# Altium PCB PCB.pcbdoc
Units mm, origin at the board's own origin, x right, y up, seen from the top; angles counter-clockwise.
Board outline 85.65 x 96.58 mm, 2 copper layers (Top Layer, Bottom Layer); 20 components, 15 nets, 79 pads, 6 vias.
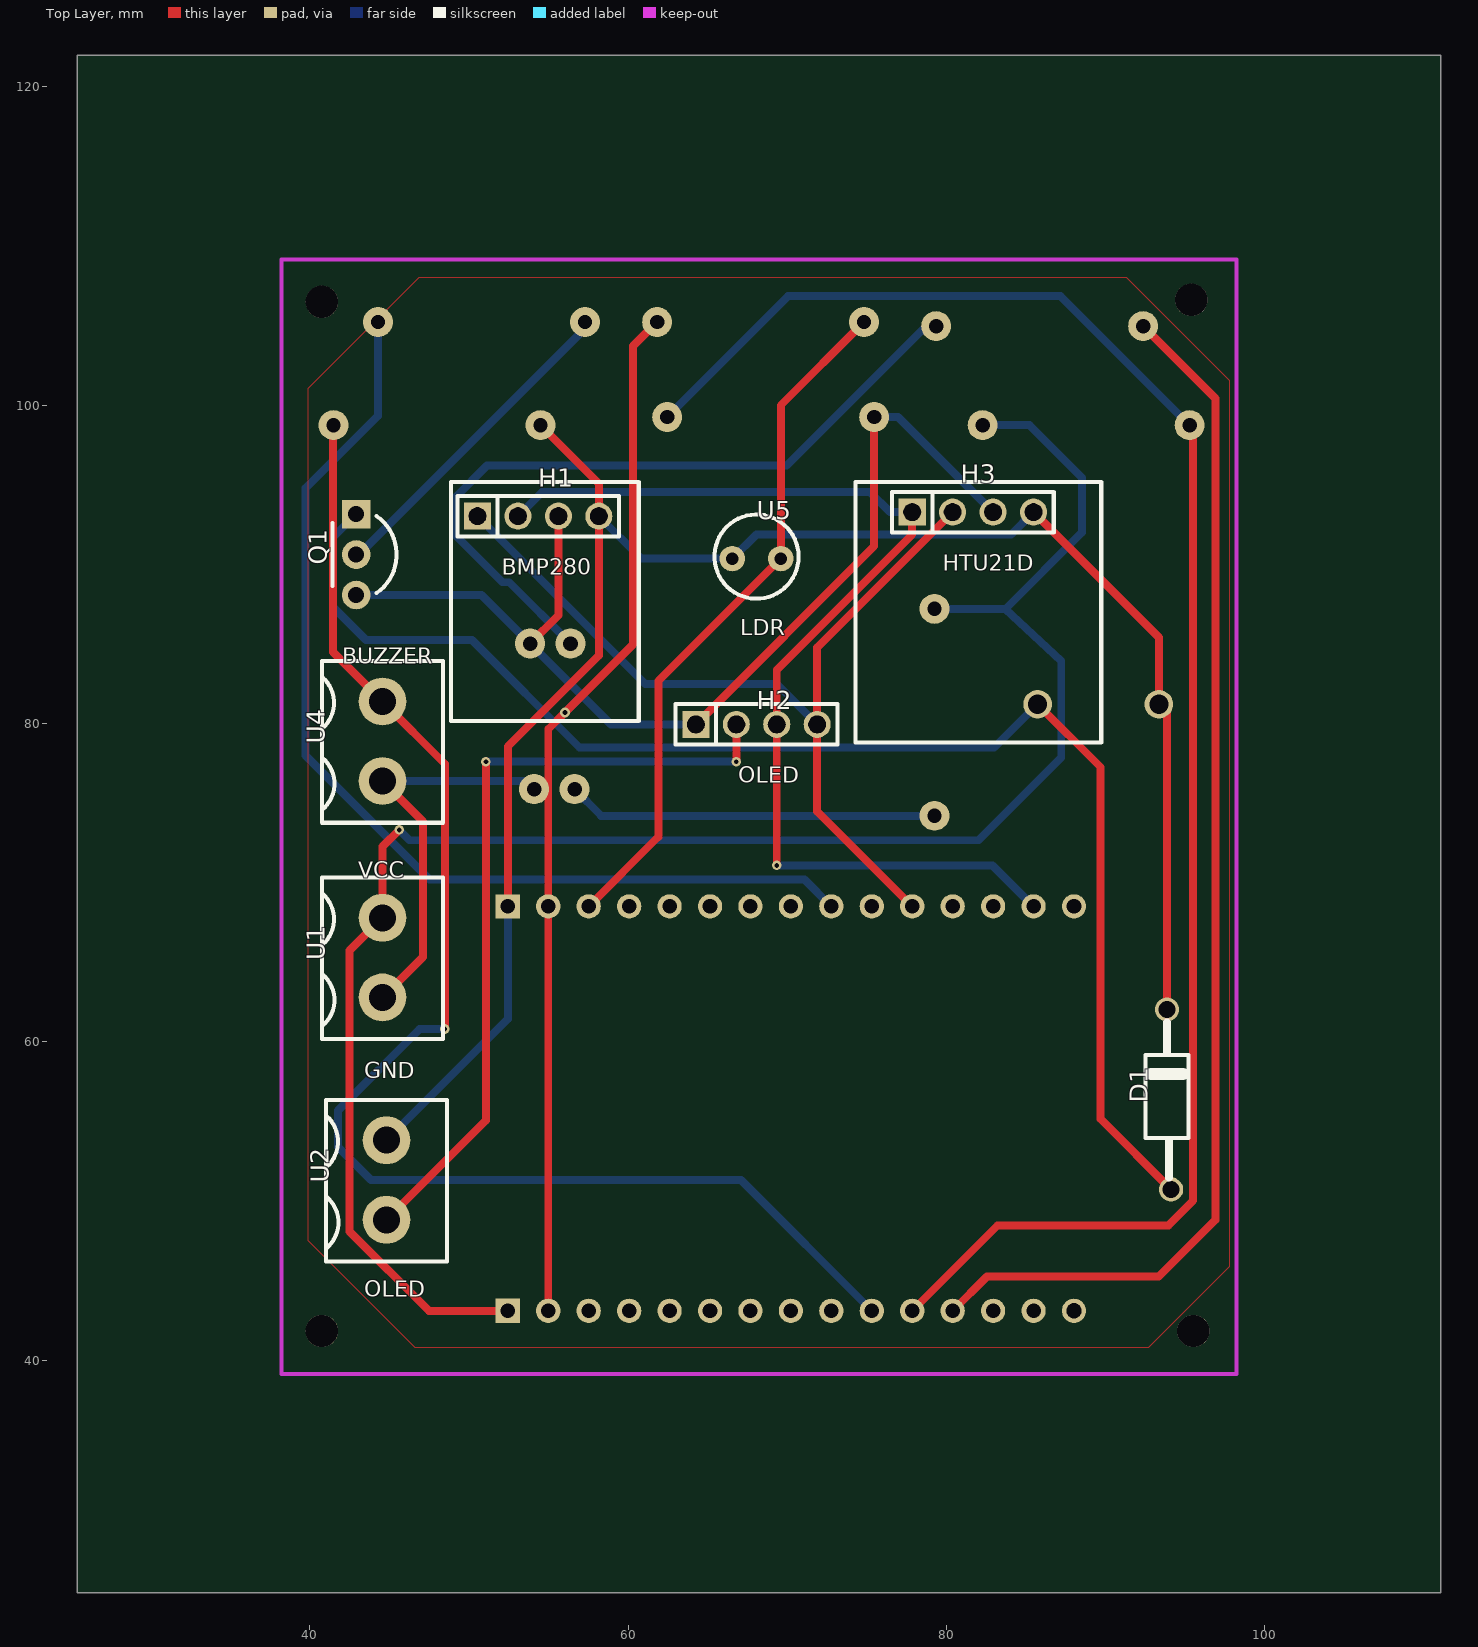
[diagram p0: Top Layer view]
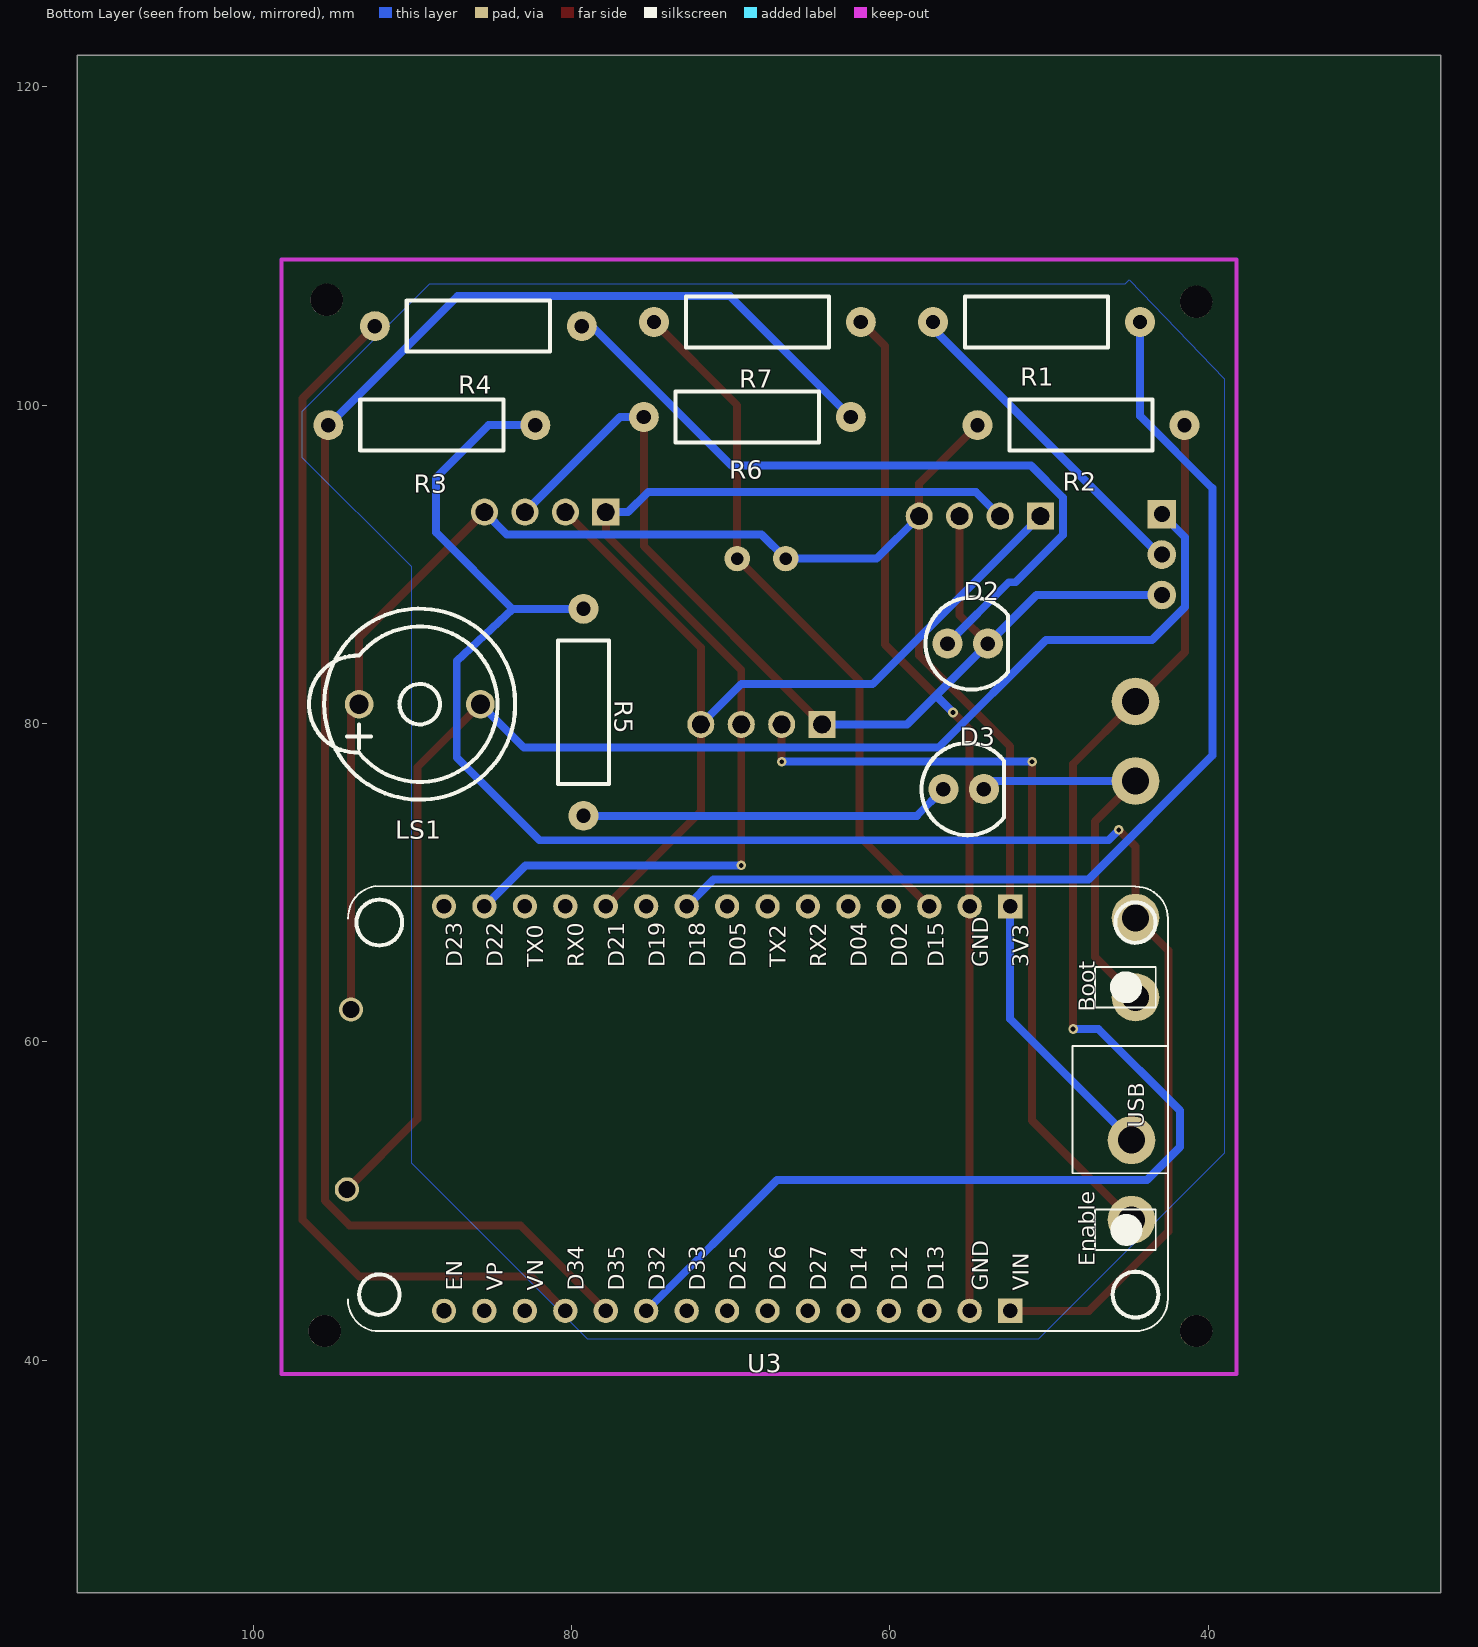
[diagram p1: Bottom Layer view, seen from below]

## Layer stack, top to bottom
Top Layer: signal copper (thickness not stored)
Dielectric: dielectric 0.32, FR-4, Dk 4.8
Bottom Layer: signal copper (thickness not stored)

## Board outline
111.054,25.4 25.4,25.4 25.4,121.983 111.054,121.983

## Components (designator, comment, footprint, x,y, rotation, side; value= is the part's Value field where it differs from the comment)
D1 "IN4007" IN4007 95.123,53.911 r90 top
D2 "LED_WIFI" "5MM LED" 56.388,85.026 r0 bottom
D3 "LED_POWER" "5MM LED" 56.642,75.882 r0 bottom
H1 "BMP280" DIP-1X4P2.54 54.356,93.027 r0 top
H2 "OLED" DIP-1X4P2.54 68.072,79.947 r0 top
H3 "HTU21D" DIP-1X4P2.54 81.661,93.281 r0 top
LS1 "BUZZER" DIP-BUZZER-12X6 89.535,81.216 r270 bottom
Q1 "BC547BTF" TO-92-3_L4.9-W3.7-P2.54-L 42.926,90.614 r270 top
R1 "220Ω" RES-TH_BD3.2-L9.0-P13.00-D0.5 50.8,105.219 r180 bottom
R2 "4.7kΩ" RES-TH_BD3.2-L9.0-P13.00-D0.5 48.006,98.742 r180 bottom
R3 "33kΩ" RES-TH_BD3.2-L9.0-P13.00-D0.5 88.773,98.742 r180 bottom
R4 "10kΩ" RES-TH_BD3.2-L9.0-P13.00-D0.5 85.852,104.965 r180 bottom
R5 "100kΩ" RES-TH_BD3.2-L9.0-P13.00-D0.5 79.248,80.709 r270 bottom
R6 "100kΩ" RES-TH_BD3.2-L9.0-P13.00-D0.5 68.961,99.251 r180 bottom
R7 "10kΩ" RES-TH_BD3.2-L9.0-P13.00-D0.5 68.326,105.219 r180 bottom
U1 "Power" "BORNERA DOS TERMINALES TERMINAL BLOCK 5MM" 44.577,62.801 r90 top
U2 "OLED ON/OFF" "BORNERA DOS TERMINALES TERMINAL BLOCK 5MM" 44.831,48.831 r90 top
U3 "ESP32 DEVKIT 30PIN" DOIT-ESP32-DEVKIT-V1 70.231,55.816 r180 bottom
U4 "BUZZER OFF" "BORNERA DOS TERMINALES TERMINAL BLOCK 5MM" 44.577,76.391 r90 top
U5 "LDR" "LDR (LDRSC058S)" 68.072,90.361 r0 top

## Footprints (in the part's own frame and the unit in brackets; to place one, negate y for a bottom-side part, rotate by r counter-clockwise, add the part's x,y. Pads: shape width x height; smd on the part's side, far side on the other; paste and mask are expansions set on the pad)
"5MM LED" [mm]
  round 1.9 hole 0.914 paste+0 mask+0.102: 1(0,0) 2(-2.54,0)
  silkscreen extent -3.81,-2.9 1.37,2.9
"BORNERA DOS TERMINALES TERMINAL BLOCK 5MM" [mm]
  round 3 hole 1.7 paste+0 mask+0.051: 1(4.999,0) 2(0,0)
  silkscreen extent -2.62,-3.81 7.54,3.81
DIP-1X4P2.54 [mm]
  rect 1.7x1.7 hole 1.1 slot 1.105 at 0 deg paste+0 mask+0.051: 1(-3.81,0)
  round 1.7 hole 1.1 slot 1.105 at 0 deg paste+0 mask+0.051: 2(-1.27,0) 3(1.27,0) 4(3.81,0)
  silkscreen extent -5.08,-1.27 5.08,1.27
DIP-BUZZER-12X6 [mm]
  round 1.8 hole 1.2 paste+0 mask+0.102: 1(0,-3.81) 2(0,3.81)
  silkscreen extent -6,-6.96 6,6
DOIT-ESP32-DEVKIT-V1 [mil]
  round 60 hole 36 slot 37.8 at 90 deg paste+0 mask+4: 1(-700.01,-500)
  round 60 hole 36 paste+0 mask+4: 2(-600.01,-500.01) 3(-500.01,-500.01) 4(-400.01,-500.01) 5(-300.01,-500.01) 6(-200.01,-500.01) 7(-100.01,-500.01) 8(-0.01,-500.01) 9(99.99,-500.01) 10(199.99,-500.01) 11(299.99,-500.01) 12(399.99,-500.01) 13(499.99,-500.01) 14(599.99,-500.01) 16(-700.01,499.99) 17(-600.01,499.99) 18(-500.01,499.99) 19(-400.01,499.99) 20(-300.01,499.99) 21(-200.01,499.99) 22(-100.01,499.99) 23(-0.01,499.99) 24(99.99,499.99) 25(199.99,499.99) 26(299.99,499.99) 27(399.99,499.99) 28(499.99,499.99) 29(599.99,499.99)
  rect 60x60 hole 36 paste+0 mask+4: 15(700,-500) 30(700.01,500)
  silkscreen extent -938,-550 1090,550
IN4007 [mil]
  round 60 hole 41.73 paste+0 mask+2: 1(-125,40) 2(320,50)
  silkscreen extent -95,-3 288,103
"LDR (LDRSC058S)" [mm]
  round 1.6 hole 0.8 paste+0 mask+0.051: 1(-1.524,0) 2(1.524,0)
  silkscreen extent -2.64,-2.51 2.64,2.77
RES-TH_BD3.2-L9.0-P13.00-D0.5 [mil]
  round 74 hole 35.43 paste+0 mask+2: 1(255.91,0) 2(-255.91,0)
  silkscreen extent -177,-63 177,63
TO-92-3_L4.9-W3.7-P2.54-L [mm]
  rect 1.8x1.8 hole 1 paste+0 mask+0.051: 1(-2.54,0)
  round 1.8 hole 1 paste+0 mask+0.051: 2(0,0) 3(2.54,0)
  silkscreen extent -2.41,-1.5 2.41,2.54

## Free pads (board coordinates)
  round 2.032 hole 2.032 unplated paste+0: ""(40.767,41.846) ""(40.767,106.489) ""(95.377,106.617) ""(95.504,41.846)

## Via types
v1: diameter 0.61, hole 0.305, Top Layer to Bottom Layer, tented both sides, 6 vias

## Nets (pads, with @x,y where several pads share a name; then routed paths per layer and width w, separated by ;. In a path a pad name is that pad's centre, name@x,y a point inside that pad or via, vN(x,y) a via of type N, cw(c..) or ccw(c..) an arc to the next point about the centre after c; other vN are vias at no path point)
3.3V: D1.2 H1.4 H3.4 LS1.1 R2.2 U2.1 U3.30 U5.1 | length 116.3
  Top Layer w0.5: U3.30 52.451,78.556 58.166,84.271 H1.4 58.166,95.083 R2.2 ; H3.4 93.345,85.407 LS1.1 93.853,80.709 D1.2
  Bottom Layer w0.5: U2.1 52.451,61.45 U3.30 ; H1.4 60.833,90.361 U5.1 68.068,91.88 84.07,91.88 H3.4
BTLEVEL: R3.2 R6.1 U3.5 | length 108.6
  Top Layer w0.5: U3.5 83.219,48.485 93.945,48.485 95.5,50.04 95.5,98.515 R3.2
  Bottom Layer w0.5: R6.1 70.055,106.845 87.171,106.845 R3.2
BUZZER: R1.1 U3.22 | length 66.1
  Bottom Layer w0.5: R1.1 44.3,99.332 39.751,94.783 39.751,77.988 47.534,70.206 71.082,70.206 U3.22
BUZZEROFF: R2.1 U3.6 U4.1 | length 89.8
  Top Layer w0.5: R2.1 41.474,98.711 41.474,84.492 U4.1 48.494,77.473 v1(48.493,60.821)
  Bottom Layer w0.5: v1(48.493,60.821) 46.914,60.82 41.783,55.689 41.783,53.404 43.856,51.331 67.097,51.331 U3.6
D1_1: D1.1 LS1.2 Q1.1 | length 89.4
  Top Layer w0.5: LS1.2 89.686,77.256 89.686,55.158 D1.1
  Bottom Layer w0.5: Q1.1 41.474,91.702 41.474,87.326 43.546,85.254 50.195,85.254 56.967,78.483 82.991,78.483 LS1.2
D2_1: D2.1 R4.1 | length 47.1
  Bottom Layer w0.5: D2.1 52.537,88.877 52.113,88.877 49.144,91.846 49.144,94.201 51.145,96.203 69.967,96.203 78.73,104.965 R4.1
GND: D2.2 D3.2 H1.3 H2.1 H3.3 Q1.3 R6.2 R7.1 U1.2 U3.14 U3.29 U4.2 | length 160.1
  Top Layer w0.5: U1.2 47.117,65.341 47.117,73.85 U4.2 ; D2.2 55.626,86.804 H1.3 ; D3.2 D3.2@54.991,75.882 ; U3.14 U3.29 D3.2@54.991,75.882 ; R7.1 60.317,103.71 60.317,84.974 v1(56.039,80.697) 54.991,79.649 D3.2@54.991,75.882 ; H2.1 75.461,91.146 R6.2
  Bottom Layer w0.5: Q1.3 50.8,88.075 D2.2 57.108,81.766 ; U4.2 53.594,76.391 D3.2 ; v1(56.039,80.697) 57.108,81.766 ; H2.1 58.928,79.947 57.108,81.766 ; R6.2 76.962,99.251 H3.3
LDR: R7.2 U3.28 U5.2 | length 43.9
  Top Layer w0.5: U3.28 61.901,72.886 61.901,82.665 U5.2 69.596,99.989 R7.2
OLEDSWITCH: H2.2 U2.2 | length 49.4
  Top Layer w0.5: U2.2 51.071,55.072 v1(51.071,77.604) ; v1(66.802,77.604) H2.2
  Bottom Layer w0.5: v1(51.071,77.604) v1(66.802,77.604)
R1_2: Q1.2 R1.2 | length 20.7
  Bottom Layer w0.5: Q1.2 43.107,90.614 57.3,104.807 R1.2
R5_1: D3.1 R5.1 | length 23.3
  Bottom Layer w0.5: D3.1 58.316,74.208 R5.1
SCL: H1.2 H2.3 H3.1 U3.17 | length 68.8
  Top Layer w0.5: v1(69.342,71.093) H2.3 69.342,83.372 77.851,91.881 H3.1
  Bottom Layer w0.5: H1.2 54.609,94.55 75.182,94.55 76.451,93.281 H3.1 ; v1(69.342,71.093) 82.894,71.093 U3.17
SDA: H1.1 H2.4 H3.2 U3.20 | length 57.5
  Top Layer w0.5: U3.20 71.882,74.485 H2.4 71.882,84.772 H3.2
  Bottom Layer w0.5: H1.1 61.084,82.49 69.339,82.49 H2.4
VCC: R3.1 R5.2 U1.1 U3.15 | length 115.7
  Top Layer w0.5: v1(45.629,73.322) 44.577,72.27 U1.1 42.515,65.738 42.515,48.104 47.502,43.116 U3.15
  Bottom Layer w0.5: v1(45.629,73.322) 46.279,72.672 82.006,72.672 87.211,77.876 87.211,83.922 83.693,87.208 R5.2 ; R3.1 85.217,98.742 88.519,95.441 88.519,92.011 83.693,87.185
WIFION: R4.2 U3.4 | length 76.9
  Top Layer w0.5: U3.4 82.54,45.265 93.335,45.265 96.901,48.831 96.901,100.416 R4.2
pads on no net: U3.1 U3.2 U3.3 U3.7 U3.8 U3.9 U3.10 U3.11 U3.12 U3.13 U3.16 U3.18 U3.19 U3.21 U3.23 U3.24 U3.25 U3.26 U3.27

## Polygon pours and split planes (outlines as drawn)
GND on Top Layer (solid): 39.878,101.028 39.878,47.561 46.609,40.831 92.71,40.831 97.79,45.91 97.79,101.536 91.313,108.013 46.863,108.013 39.878,101.028
GND on Bottom Layer (solid): 38.989,101.663 38.989,53.023 50.673,41.338 78.994,41.338 90.043,52.387 90.043,89.852 96.901,96.71 96.901,99.632 88.9,107.632 45.212,107.632 44.958,107.886

## Silkscreen, mask and mechanical layers (free items; w line width, h text height)
Top Overlay:
  lines w0.254: 48.895,80.169 60.674,80.169 60.674,95.186 48.895,95.186 48.895,80.169 ; 74.295,78.803 89.725,78.803 89.725,95.186 74.295,95.186 74.295,78.803
  text "HTU21D" at 79.756,89.607 h1
  text "BMP280" at 52.07,89.353 h1
  text "LDR" at 67.056,85.543 h1
  text "BUZZER" at 42.037,83.765 h1
  text "OLED" at 66.929,76.272 h1
  text "VCC" at 43.053,70.303 h1
  text "GND" at 43.434,57.73 h1
  text "OLED" at 43.434,44.014 h1

## Text inside footprints (layer, text, board x,y; h text height)
U3: Bottom Overlay "Enable" at 47.125,45.91 h1 r270; Bottom Overlay "Boot" at 47.125,61.912 h1 r270; Bottom Overlay "USB" at 44.021,54.617 h1 r270; Bottom Overlay "EN" at 86.851,44.386 h1 r270; Bottom Overlay "VP" at 84.311,44.386 h1 r270; Bottom Overlay "VN" at 81.771,44.386 h1 r270; Bottom Overlay "D34" at 79.231,44.386 h1 r270; Bottom Overlay "D35" at 76.691,44.386 h1 r270; Bottom Overlay "D32" at 74.151,44.386 h1 r270; Bottom Overlay "D33" at 71.611,44.386 h1 r270; Bottom Overlay "D13" at 56.625,44.386 h1 r270; Bottom Overlay "D12" at 58.911,44.386 h1 r270; Bottom Overlay "D14" at 61.451,44.386 h1 r270; Bottom Overlay "D27" at 63.991,44.386 h1 r270; Bottom Overlay "D26" at 66.531,44.386 h1 r270; Bottom Overlay "D25" at 69.071,44.386 h1 r270; Bottom Overlay "D05" at 69.071,64.706 h1 r270; Bottom Overlay "TX2" at 66.531,64.706 h1 r270; Bottom Overlay "RX2" at 63.991,64.706 h1 r270; Bottom Overlay "D04" at 61.451,64.706 h1 r270; Bottom Overlay "D02" at 58.911,64.706 h1 r270; Bottom Overlay "D15" at 56.625,64.706 h1 r270; Bottom Overlay "D18" at 71.611,64.706 h1 r270; Bottom Overlay "D19" at 74.151,64.706 h1 r270; Bottom Overlay "D21" at 76.691,64.706 h1 r270; Bottom Overlay "RX0" at 79.231,64.706 h1 r270; Bottom Overlay "TX0" at 81.771,64.706 h1 r270; Bottom Overlay "D22" at 84.311,64.706 h1 r270; Bottom Overlay "D23" at 86.851,64.706 h1 r270; Bottom Overlay "GND" at 53.831,64.706 h1 r270; Bottom Overlay "3V3" at 51.291,64.706 h1 r270; Bottom Overlay "VIN" at 51.291,44.386 h1 r270; Bottom Overlay "GND" at 53.831,44.386 h1 r270